# Altium PCB SWM1000模块封装.PcbDoc
Units mil, origin at the board's own origin, x right, y up, seen from the top; angles counter-clockwise.
Board outline 944.88 x 1377.95 mil, 2 copper layers (Top, Bottom), stack 12.7 mil thick; 25 components, 0 nets, 25 pads, 0 vias.
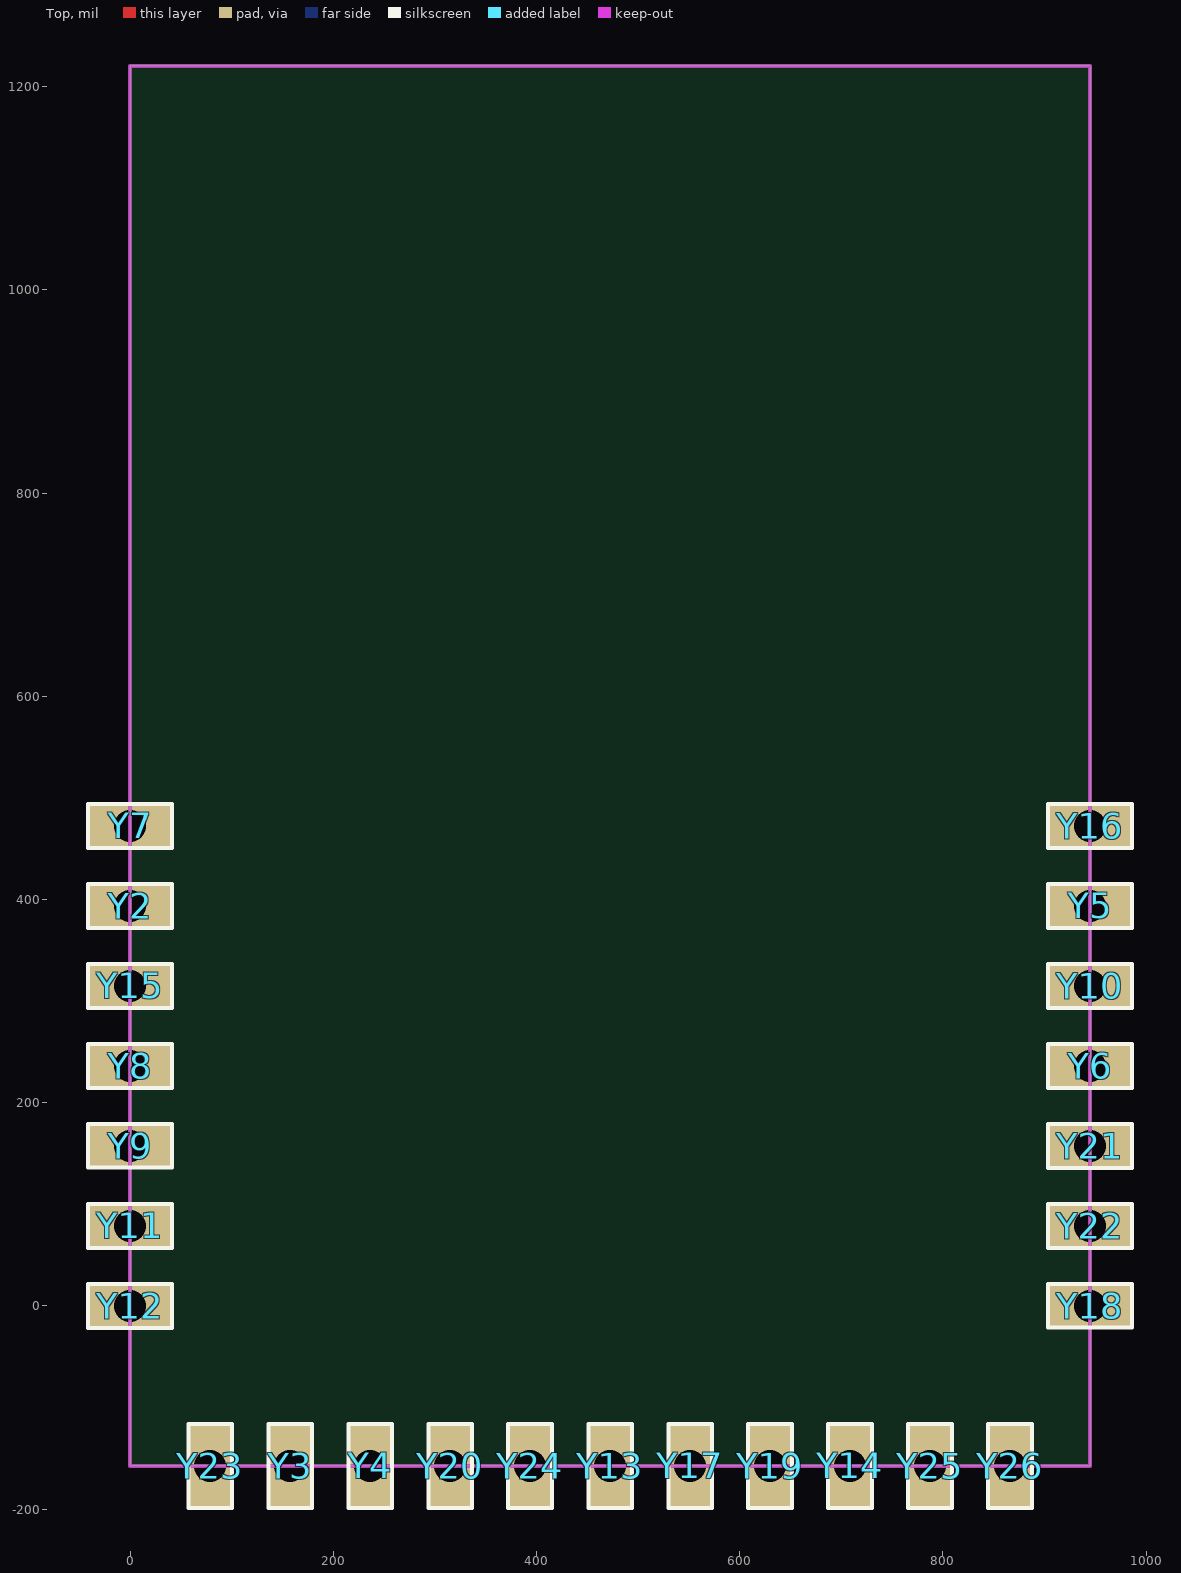
[diagram p0: Top view]
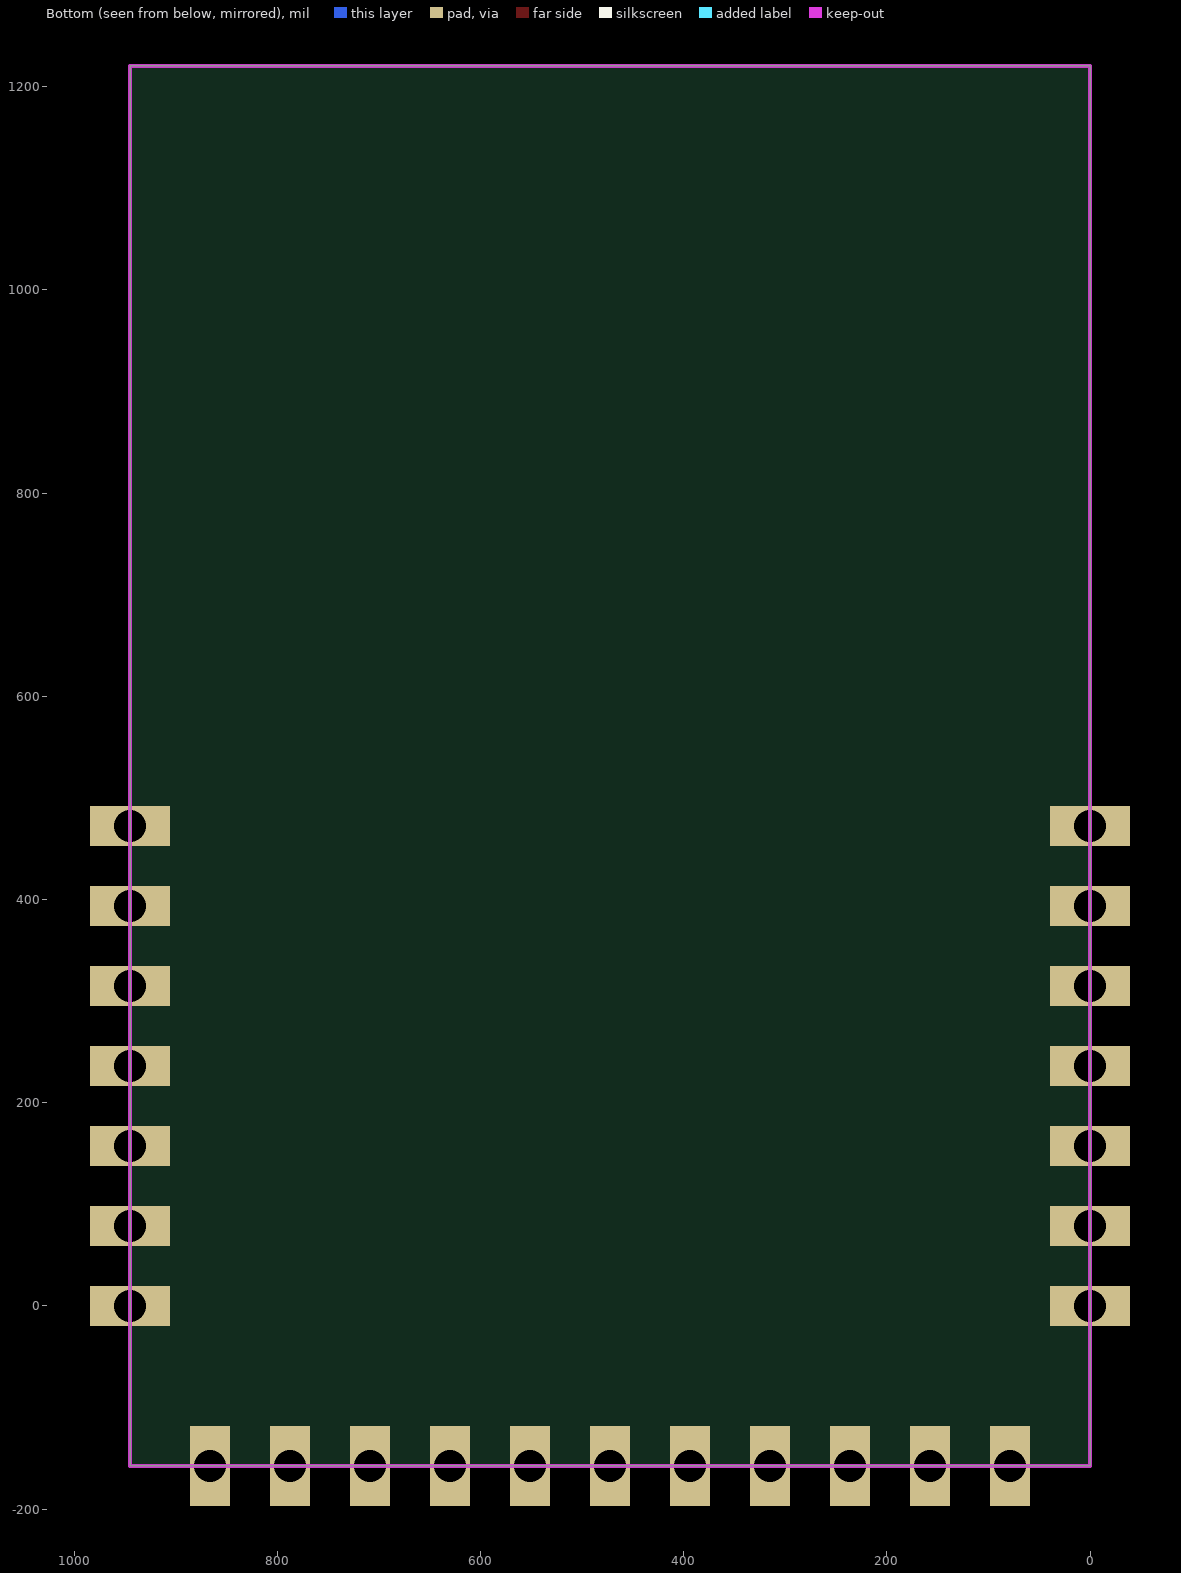
[diagram p1: Bottom view, seen from below]

## Layer stack, top to bottom
Solder Mask Top: solder mask 0.4, Solder Resist, Dk 3.5
Top: signal copper 1.35
Dielectric 1: dielectric 10, FR-4, Dk 4.3
Bottom: signal copper 1.35
Solder Mask Bottom: solder mask 0.4, Solder Resist, Dk 3.5

## Board outline
0,1220.47 944.88,1220.47 944.88,-157.48 0,-157.48

## Design rules (kind name [scope] priority, off if disabled: settings)
Clearance "'Default' PADS rule_20" [All] p1: gap=6.69
Clearance "'Default' PADS rule_19" [InPolygon vs InPolygon] p2: gap=9.84
Clearance "'Default' PADS rule_18" [All] p3: gap=6.69
Clearance "'Default' PADS rule_15" [IsVia vs IsVia] p4: gap=6.69
ComponentClearance "'Default' PADS rule_12" [All] p1: gap=6 collisioncheckmode=3 verticalgap=10 showdistances=FALSE
FlightTimeFalling "'Default' PADS rule_10" [All] p1: maximum=10.00
FlightTimeRising "'Default' PADS rule_9" [All] p1: maximum=10.00
Length "'Default' PADS rule_5" [All] p1: maxlimit=50000 minlimit=0
MatchedLengths "'Default' PADS rule_11" [InNetClass('All Nets')] p1: tolerance=200 checknetsindiffpair=TRUE checkdiffpairvsdiffpair=TRUE checkothers=TRUE
MaxMinImpedance "'Default' PADS rule_8" [All] p1: minimum=50.00 maximum=150.0
ParallelSegment "'Default' PADS rule_7" [All] p1: limit=1000 gap=200
ParallelSegment "'Default' PADS rule_6" [All] p2: limit=1000 gap=200
PlaneClearance "'Default' PADS rule_14" [All] p1: clearance=9.84
PlaneConnect "Power Plane Connect Style - pads with no thermal" [(Name='Y10-1') Or (Name='Y11-1') Or (Name='Y12-1') Or (Name='Y13-1') Or (Name='Y14-1') Or (Name='Y15-1') Or (Name='Y16-1') Or (Name='Y17-1') Or (Name='Y18-1') Or (Name='Y19-1') Or (Name='Y2-1') Or (Name='Y20-1') Or (Name='Y21-1') Or (Name='Y22-1') Or (Name='Y23-1') Or (Name='Y24-1') Or (Name='Y25-1') Or (Name='Y26-1') Or (Name='Y3-1') Or (Name='Y4-1') Or (Name='Y5-1') Or (Name='Y6-1') Or (Name='Y7-1') Or (Name='Y8-1') Or (Name='Y9-1')] p1: planeconnectstyle=NoConnect reliefexpansion=20 reliefentries=4 reliefconductorwidth=10 reliefairgap=10 // PAD - No Thermal Connect Rule
PlaneConnect "Power Plane Connect Style - Via from round thru-hole global defaults" [IsVia] p2: planeconnectstyle=Direct reliefexpansion=20 reliefentries=4 reliefconductorwidth=6.69 reliefairgap=10
PlaneConnect "Power Plane Connect Style - Round thru-hole pad from global defaults" [IsPad And OnMultiLayer And (PadShape_MidLayer1 = 'Round') And (PadXSize_MidLayer1 = PadYSize_MidLayer1)] p3: planeconnectstyle=Direct reliefexpansion=20 reliefentries=4 reliefconductorwidth=6.69 reliefairgap=10
PlaneConnect "Power Plane Connect Style - Square thru-hole pad from global defaults" [IsPad And OnMultiLayer And ((PadShape_MidLayer1 = 'Rectangular') Or (PadShape_MidLayer1 = 'Octagonal') Or (PadShape_MidLayer1 = 'Rounded Rectangle')) And (PadXSize_MidLayer1 = PadYSize_MidLayer1)] p4: planeconnectstyle=Direct reliefexpansion=20 reliefentries=4 reliefconductorwidth=6.69 reliefairgap=10
PlaneConnect "Power Plane Connect Style - Rect thru-hole pad from global defaults" [IsPad And OnMultiLayer And ((PadShape_MidLayer1 = 'Rectangular') Or (PadShape_MidLayer1 = 'Octagonal') Or (PadShape_MidLayer1 = 'Rounded Rectangle')) And (PadXSize_MidLayer1 <> PadYSize_MidLayer1)] p5: planeconnectstyle=Direct reliefexpansion=20 reliefentries=4 reliefconductorwidth=6.69 reliefairgap=10
PlaneConnect "Power Plane Connect Style - Square-rect thru-hole pad from global defaults" [IsPad And OnMultiLayer And (PadShape_MidLayer1 = 'Rounded Rectangle') And (PadXSize_MidLayer1 = PadYSize_MidLayer1) And (Pad_CornerRadius_MidLayer1 = '0%')] p6: planeconnectstyle=Direct reliefexpansion=20 reliefentries=4 reliefconductorwidth=6.69 reliefairgap=10
PlaneConnect "Power Plane Connect Style - Oval thru-hole pad from global defaults" [IsPad And OnMultiLayer And (PadShape_MidLayer1 = 'Round') And (PadXSize_MidLayer1 <> PadYSize_MidLayer1)] p7: planeconnectstyle=Direct reliefexpansion=20 reliefentries=4 reliefconductorwidth=6.69 reliefairgap=10
PlaneConnect "Power Plane Connect Style - Round-oval thru-hole pad from global defaults" [IsPad And OnMultiLayer And (PadShape_MidLayer1 = 'Rounded Rectangle') And (PadXSize_MidLayer1 = PadYSize_MidLayer1) And (Pad_CornerRadius_MidLayer1 = '100%')] p8: planeconnectstyle=Direct reliefexpansion=20 reliefentries=4 reliefconductorwidth=6.69 reliefairgap=10
PolygonConnect "Polygon Connect Style - Bottom Round SMD from global defaults" [IsSMTPin And (PadShape_BottomLayer = 'Round') And (PadXSize_BottomLayer = PADYSize_BottomLayer) vs Layer = 'Bottom'] p1: connectstyle=Direct reliefconductorwidth=6.69 reliefentries=4 polygonreliefangle="45 Angle" airgapwidth=10
PolygonConnect "Polygon Connect Style - Top Round SMD from global defaults" [IsSMTPin And (PadShape_TopLayer = 'Round') And (PadXSize_TopLayer = PADYSize_TopLayer) vs Layer = 'Top'] p2: connectstyle=Direct reliefconductorwidth=6.69 reliefentries=4 polygonreliefangle="45 Angle" airgapwidth=10
PolygonConnect "Polygon Connect Style - Bottom Square SMD from global defaults 1" [IsSMTPin And (PadShape_BottomLayer = 'Rectangular') And (PadXSize_BottomLayer = PADYSize_BottomLayer) vs Layer = 'Bottom'] p3: connectstyle=Direct reliefconductorwidth=6.69 reliefentries=4 polygonreliefangle="45 Angle" airgapwidth=10
PolygonConnect "Polygon Connect Style - Bottom Square SMD from global defaults 2" [IsSMTPin And (PadShape_BottomLayer = 'Octagonal') And (PadXSize_BottomLayer = PADYSize_BottomLayer) vs Layer = 'Bottom'] p4: connectstyle=Direct reliefconductorwidth=6.69 reliefentries=4 polygonreliefangle="45 Angle" airgapwidth=10
PolygonConnect "Polygon Connect Style - Bottom Square SMD from global defaults 3" [IsSMTPin And (PadShape_BottomLayer = 'Rounded Rectangle') And (PadXSize_BottomLayer = PADYSize_BottomLayer) vs Layer = 'Bottom'] p5: connectstyle=Direct reliefconductorwidth=6.69 reliefentries=4 polygonreliefangle="45 Angle" airgapwidth=10
PolygonConnect "Polygon Connect Style - Top Square SMD from global defaults 1" [IsSMTPin And (PadShape_TopLayer = 'Rectangular') And (PadXSize_TopLayer = PADYSize_TopLayer) vs Layer = 'Top'] p6: connectstyle=Direct reliefconductorwidth=6.69 reliefentries=4 polygonreliefangle="45 Angle" airgapwidth=10
PolygonConnect "Polygon Connect Style - Top Square SMD from global defaults 2" [IsSMTPin And (PadShape_TopLayer = 'Octagonal') And (PadXSize_TopLayer = PADYSize_TopLayer) vs Layer = 'Top'] p7: connectstyle=Direct reliefconductorwidth=6.69 reliefentries=4 polygonreliefangle="45 Angle" airgapwidth=10
PolygonConnect "Polygon Connect Style - Top Square SMD from global defaults 3" [IsSMTPin And (PadShape_TopLayer = 'Rounded Rectangle') And (PadXSize_TopLayer = PADYSize_TopLayer) vs Layer = 'Top'] p8: connectstyle=Direct reliefconductorwidth=6.69 reliefentries=4 polygonreliefangle="45 Angle" airgapwidth=10
PolygonConnect "Polygon Connect Style - Bottom Rect SMD from global defaults 1" [IsSMTPin And (PadShape_BottomLayer = 'Rectangular') And (PadXSize_BottomLayer <> PADYSize_BottomLayer) vs Layer = 'Bottom'] p9: connectstyle=Direct reliefconductorwidth=6.69 reliefentries=4 polygonreliefangle="45 Angle" airgapwidth=10
PolygonConnect "Polygon Connect Style - Bottom Rect SMD from global defaults 2" [IsSMTPin And (PadShape_BottomLayer = 'Octagonal') And (PadXSize_BottomLayer <> PADYSize_BottomLayer) vs Layer = 'Bottom'] p10: connectstyle=Direct reliefconductorwidth=6.69 reliefentries=4 polygonreliefangle="45 Angle" airgapwidth=10
PolygonConnect "Polygon Connect Style - Bottom Rect SMD from global defaults 3" [IsSMTPin And (PadShape_BottomLayer = 'Rounded Rectangle') And (PadXSize_BottomLayer <> PADYSize_BottomLayer) vs Layer = 'Bottom'] p11: connectstyle=Direct reliefconductorwidth=6.69 reliefentries=4 polygonreliefangle="45 Angle" airgapwidth=10
PolygonConnect "Polygon Connect Style - Bottom Square-rect SMD pad from global defaults" [IsSMTPin And (PadShape_BottomLayer = 'Rounded Rectangle') And (PadXSize_BottomLayer = PADYSize_BottomLayer) And (Pad_CornerRadius_BottomLayer = '0%') vs Layer = 'Bottom'] p12: connectstyle=Direct reliefconductorwidth=6.69 reliefentries=4 polygonreliefangle="45 Angle" airgapwidth=10
PolygonConnect "Polygon Connect Style - Top Rect SMD from global defaults 1" [IsSMTPin And (PadShape_TopLayer = 'Rectangular') And (PadXSize_TopLayer <> PADYSize_TopLayer) vs Layer = 'Top'] p13: connectstyle=Direct reliefconductorwidth=6.69 reliefentries=4 polygonreliefangle="45 Angle" airgapwidth=10
PolygonConnect "Polygon Connect Style - Top Rect SMD from global defaults 2" [IsSMTPin And (PadShape_TopLayer = 'Octagonal') And (PadXSize_TopLayer <> PADYSize_TopLayer) vs Layer = 'Top'] p14: connectstyle=Direct reliefconductorwidth=6.69 reliefentries=4 polygonreliefangle="45 Angle" airgapwidth=10
PolygonConnect "Polygon Connect Style - Top Rect SMD from global defaults 3" [IsSMTPin And (PadShape_TopLayer = 'Rounded Rectangle') And (PadXSize_TopLayer <> PADYSize_TopLayer) vs Layer = 'Top'] p15: connectstyle=Direct reliefconductorwidth=6.69 reliefentries=4 polygonreliefangle="45 Angle" airgapwidth=10
PolygonConnect "Polygon Connect Style - Top Square-rect SMD pad from global defaults" [IsSMTPin And (PadShape_TopLayer = 'Rounded Rectangle') And (PadXSize_TopLayer = PADYSize_TopLayer) And (Pad_CornerRadius_TopLayer = '0%') vs Layer = 'Top'] p16: connectstyle=Direct reliefconductorwidth=6.69 reliefentries=4 polygonreliefangle="45 Angle" airgapwidth=10
PolygonConnect "Polygon Connect Style - Bottom Oval SMD from global defaults" [IsSMTPin And (PadShape_BottomLayer = 'Round') And (PadXSize_BottomLayer <> PADYSize_BottomLayer) vs Layer = 'Bottom'] p17: connectstyle=Direct reliefconductorwidth=6.69 reliefentries=4 polygonreliefangle="45 Angle" airgapwidth=10
PolygonConnect "Polygon Connect Style - Bottom Round-oval SMD pad from global defaults" [IsSMTPin And (PadShape_BottomLayer = 'Rounded Rectangle') And (PadXSize_BottomLayer = PADYSize_BottomLayer) And (Pad_CornerRadius_BottomLayer = '100%') vs Layer = 'Bottom'] p18: connectstyle=Direct reliefconductorwidth=6.69 reliefentries=4 polygonreliefangle="45 Angle" airgapwidth=10
PolygonConnect "Polygon Connect Style - Top Oval SMD from global defaults" [IsSMTPin And (PadShape_TopLayer = 'Round') And (PadXSize_TopLayer <> PADYSize_TopLayer) vs Layer = 'Top'] p19: connectstyle=Direct reliefconductorwidth=6.69 reliefentries=4 polygonreliefangle="45 Angle" airgapwidth=10
PolygonConnect "Polygon Connect Style - Top Round-oval SMD pad from global defaults" [IsSMTPin And (PadShape_TopLayer = 'Rounded Rectangle') And (PadXSize_TopLayer = PADYSize_TopLayer) And (Pad_CornerRadius_TopLayer = '100%') vs Layer = 'Top'] p20: connectstyle=Direct reliefconductorwidth=6.69 reliefentries=4 polygonreliefangle="45 Angle" airgapwidth=10
PolygonConnect "Polygon Connect Style - Via from round thru-hole global defaults_23" [IsVia] p21: connectstyle=Direct reliefconductorwidth=6.69 reliefentries=4 polygonreliefangle="45 Angle" airgapwidth=10
PolygonConnect "Polygon Connect Style - Bottom Round thru-hole pad from global defaults" [IsPad And OnMultiLayer And (PadShape_BottomLayer = 'Round') And (PadXSize_BottomLayer = PADYSize_BottomLayer) vs Layer = 'Bottom'] p22: connectstyle=Direct reliefconductorwidth=6.69 reliefentries=4 polygonreliefangle="45 Angle" airgapwidth=10
PolygonConnect "Polygon Connect Style - Via from round thru-hole global defaults_22" [IsVia] p23: connectstyle=Direct reliefconductorwidth=6.69 reliefentries=4 polygonreliefangle="45 Angle" airgapwidth=10
PolygonConnect "Polygon Connect Style - Inner Layer 3 Round thru-hole pad from global defaults" [IsPad And OnMultiLayer And (PadShape_MidLayer2 = 'Round') And (PadXSize_MidLayer2 = PADYSize_MidLayer2) vs Layer = 'Inner Layer 3'] p24: connectstyle=Direct reliefconductorwidth=6.69 reliefentries=4 polygonreliefangle="45 Angle" airgapwidth=10
PolygonConnect "Polygon Connect Style - Via from round thru-hole global defaults_21" [IsVia] p25: connectstyle=Direct reliefconductorwidth=6.69 reliefentries=4 polygonreliefangle="45 Angle" airgapwidth=10
PolygonConnect "Polygon Connect Style - Inner Layer 2 Round thru-hole pad from global defaults" [IsPad And OnMultiLayer And (PadShape_MidLayer1 = 'Round') And (PadXSize_MidLayer1 = PADYSize_MidLayer1) vs Layer = 'Inner Layer 2'] p26: connectstyle=Direct reliefconductorwidth=6.69 reliefentries=4 polygonreliefangle="45 Angle" airgapwidth=10
PolygonConnect "Polygon Connect Style - Via from round thru-hole global defaults" [IsVia] p27: connectstyle=Direct reliefconductorwidth=6.69 reliefentries=4 polygonreliefangle="45 Angle" airgapwidth=10
PolygonConnect "Polygon Connect Style - Top Round thru-hole pad from global defaults" [IsPad And OnMultiLayer And (PadShape_TopLayer = 'Round') And (PadXSize_TopLayer = PADYSize_TopLayer) vs Layer = 'Top'] p28: connectstyle=Direct reliefconductorwidth=6.69 reliefentries=4 polygonreliefangle="45 Angle" airgapwidth=10
PolygonConnect "Polygon Connect Style - Bottom Square thru-hole pad from global defaults" [IsPad And OnMultiLayer And ((PadShape_BottomLayer = 'Rectangular') Or (PadShape_BottomLayer = 'Octagonal') Or (PadShape_BottomLayer = 'Rounded Rectangle')) And (PadXSize_BottomLayer = PADYSize_BottomLayer) vs Layer = 'Bottom'] p29: connectstyle=Direct reliefconductorwidth=6.69 reliefentries=4 polygonreliefangle="45 Angle" airgapwidth=10
PolygonConnect "Polygon Connect Style - Inner Layer 3 Square thru-hole pad from global defaults" [IsPad And OnMultiLayer And ((PadShape_MidLayer2 = 'Rectangular') Or (PadShape_MidLayer2 = 'Octagonal') Or (PadShape_MidLayer2 = 'Rounded Rectangle')) And (PadXSize_MidLayer2 = PADYSize_MidLayer2) vs Layer = 'Inner Layer 3'] p30: connectstyle=Direct reliefconductorwidth=6.69 reliefentries=4 polygonreliefangle="45 Angle" airgapwidth=10
PolygonConnect "Polygon Connect Style - Inner Layer 2 Square thru-hole pad from global defaults" [IsPad And OnMultiLayer And ((PadShape_MidLayer1 = 'Rectangular') Or (PadShape_MidLayer1 = 'Octagonal') Or (PadShape_MidLayer1 = 'Rounded Rectangle')) And (PadXSize_MidLayer1 = PADYSize_MidLayer1) vs Layer = 'Inner Layer 2'] p31: connectstyle=Direct reliefconductorwidth=6.69 reliefentries=4 polygonreliefangle="45 Angle" airgapwidth=10
PolygonConnect "Polygon Connect Style - Top Square thru-hole pad from global defaults" [IsPad And OnMultiLayer And ((PadShape_TopLayer = 'Rectangular') Or (PadShape_TopLayer = 'Octagonal') Or (PadShape_TopLayer = 'Rounded Rectangle')) And (PadXSize_TopLayer = PADYSize_TopLayer) vs Layer = 'Top'] p32: connectstyle=Direct reliefconductorwidth=6.69 reliefentries=4 polygonreliefangle="45 Angle" airgapwidth=10
PolygonConnect "Polygon Connect Style - Bottom Rect thru-hole pad from global defaults" [IsPad And OnMultiLayer And ((PadShape_BottomLayer = 'Rectangular') Or (PadShape_BottomLayer = 'Octagonal') Or (PadShape_BottomLayer = 'Rounded Rectangle')) And (PadXSize_BottomLayer <> PADYSize_BottomLayer) vs Layer = 'Bottom'] p33: connectstyle=Direct reliefconductorwidth=6.69 reliefentries=4 polygonreliefangle="45 Angle" airgapwidth=10
PolygonConnect "Polygon Connect Style - Bottom Square-rect thru-hole pad from global defaults" [IsPad And OnMultiLayer And (PadShape_BottomLayer = 'Rounded Rectangle') And (PadXSize_BottomLayer = PADYSize_BottomLayer) And (Pad_CornerRadius_BottomLayer = '0%') vs Layer = 'Bottom'] p34: connectstyle=Direct reliefconductorwidth=6.69 reliefentries=4 polygonreliefangle="45 Angle" airgapwidth=10
PolygonConnect "Polygon Connect Style - Inner Layer 3 Rect thru-hole pad from global defaults" [IsPad And OnMultiLayer And ((PadShape_MidLayer2 = 'Rectangular') Or (PadShape_MidLayer2 = 'Octagonal') Or (PadShape_MidLayer2 = 'Rounded Rectangle')) And (PadXSize_MidLayer2 <> PADYSize_MidLayer2) vs Layer = 'Inner Layer 3'] p35: connectstyle=Direct reliefconductorwidth=6.69 reliefentries=4 polygonreliefangle="45 Angle" airgapwidth=10
PolygonConnect "Polygon Connect Style - Inner Layer 3 Square-rect thru-hole pad from global defaults" [IsPad And OnMultiLayer And (PadShape_MidLayer2 = 'Rounded Rectangle') And (PadXSize_MidLayer2 = PADYSize_MidLayer2) And (Pad_CornerRadius_MidLayer2 = '0%') vs Layer = 'Inner Layer 3'] p36: connectstyle=Direct reliefconductorwidth=6.69 reliefentries=4 polygonreliefangle="45 Angle" airgapwidth=10
PolygonConnect "Polygon Connect Style - Inner Layer 2 Rect thru-hole pad from global defaults" [IsPad And OnMultiLayer And ((PadShape_MidLayer1 = 'Rectangular') Or (PadShape_MidLayer1 = 'Octagonal') Or (PadShape_MidLayer1 = 'Rounded Rectangle')) And (PadXSize_MidLayer1 <> PADYSize_MidLayer1) vs Layer = 'Inner Layer 2'] p37: connectstyle=Direct reliefconductorwidth=6.69 reliefentries=4 polygonreliefangle="45 Angle" airgapwidth=10
PolygonConnect "Polygon Connect Style - Inner Layer 2 Square-rect thru-hole pad from global defaults" [IsPad And OnMultiLayer And (PadShape_MidLayer1 = 'Rounded Rectangle') And (PadXSize_MidLayer1 = PADYSize_MidLayer1) And (Pad_CornerRadius_MidLayer1 = '0%') vs Layer = 'Inner Layer 2'] p38: connectstyle=Direct reliefconductorwidth=6.69 reliefentries=4 polygonreliefangle="45 Angle" airgapwidth=10
PolygonConnect "Polygon Connect Style - Top Rect thru-hole pad from global defaults" [IsPad And OnMultiLayer And ((PadShape_TopLayer = 'Rectangular') Or (PadShape_TopLayer = 'Octagonal') Or (PadShape_TopLayer = 'Rounded Rectangle')) And (PadXSize_TopLayer <> PADYSize_TopLayer) vs Layer = 'Top'] p39: connectstyle=Direct reliefconductorwidth=6.69 reliefentries=4 polygonreliefangle="45 Angle" airgapwidth=10
PolygonConnect "Polygon Connect Style - Top Square-rect thru-hole pad from global defaults" [IsPad And OnMultiLayer And (PadShape_TopLayer = 'Rounded Rectangle') And (PadXSize_TopLayer = PADYSize_TopLayer) And (Pad_CornerRadius_TopLayer = '0%') vs Layer = 'Top'] p40: connectstyle=Direct reliefconductorwidth=6.69 reliefentries=4 polygonreliefangle="45 Angle" airgapwidth=10
PolygonConnect "Polygon Connect Style - Bottom Oval thru-hole pad from global defaults" [IsPad And OnMultiLayer And (PadShape_BottomLayer = 'Round') And (PadXSize_BottomLayer <> PADYSize_BottomLayer) vs Layer = 'Bottom'] p41: connectstyle=Direct reliefconductorwidth=6.69 reliefentries=4 polygonreliefangle="45 Angle" airgapwidth=10
PolygonConnect "Polygon Connect Style - Bottom Round-oval thru-hole pad from global defaults" [IsPad And OnMultiLayer And (PadShape_BottomLayer = 'Rounded Rectangle') And (PadXSize_BottomLayer = PADYSize_BottomLayer) And (Pad_CornerRadius_BottomLayer = '100%') vs Layer = 'Bottom'] p42: connectstyle=Direct reliefconductorwidth=6.69 reliefentries=4 polygonreliefangle="45 Angle" airgapwidth=10
PolygonConnect "Polygon Connect Style - Inner Layer 3 Oval thru-hole pad from global defaults" [IsPad And OnMultiLayer And (PadShape_MidLayer2 = 'Round') And (PadXSize_MidLayer2 <> PADYSize_MidLayer2) vs Layer = 'Inner Layer 3'] p43: connectstyle=Direct reliefconductorwidth=6.69 reliefentries=4 polygonreliefangle="45 Angle" airgapwidth=10
PolygonConnect "Polygon Connect Style - Inner Layer 3 Round-oval thru-hole pad from global defaults" [IsPad And OnMultiLayer And (PadShape_MidLayer2 = 'Rounded Rectangle') And (PadXSize_MidLayer2 = PADYSize_MidLayer2) And (Pad_CornerRadius_MidLayer2 = '100%') vs Layer = 'Inner Layer 3'] p44: connectstyle=Direct reliefconductorwidth=6.69 reliefentries=4 polygonreliefangle="45 Angle" airgapwidth=10
PolygonConnect "Polygon Connect Style - Inner Layer 2 Oval thru-hole pad from global defaults" [IsPad And OnMultiLayer And (PadShape_MidLayer1 = 'Round') And (PadXSize_MidLayer1 <> PADYSize_MidLayer1) vs Layer = 'Inner Layer 2'] p45: connectstyle=Direct reliefconductorwidth=6.69 reliefentries=4 polygonreliefangle="45 Angle" airgapwidth=10
PolygonConnect "Polygon Connect Style - Inner Layer 2 Round-oval thru-hole pad from global defaults" [IsPad And OnMultiLayer And (PadShape_MidLayer1 = 'Rounded Rectangle') And (PadXSize_MidLayer1 = PADYSize_MidLayer1) And (Pad_CornerRadius_MidLayer1 = '100%') vs Layer = 'Inner Layer 2'] p46: connectstyle=Direct reliefconductorwidth=6.69 reliefentries=4 polygonreliefangle="45 Angle" airgapwidth=10
PolygonConnect "Polygon Connect Style - Top Oval thru-hole pad from global defaults" [IsPad And OnMultiLayer And (PadShape_TopLayer = 'Round') And (PadXSize_TopLayer <> PADYSize_TopLayer) vs Layer = 'Top'] p47: connectstyle=Direct reliefconductorwidth=6.69 reliefentries=4 polygonreliefangle="45 Angle" airgapwidth=10
PolygonConnect "Polygon Connect Style - Top Round-oval thru-hole pad from global defaults" [IsPad And OnMultiLayer And (PadShape_TopLayer = 'Rounded Rectangle') And (PadXSize_TopLayer = PADYSize_TopLayer) And (Pad_CornerRadius_TopLayer = '100%') vs Layer = 'Top'] p48: connectstyle=Direct reliefconductorwidth=6.69 reliefentries=4 polygonreliefangle="45 Angle" airgapwidth=10
PolygonConnect [All] p49: connectstyle=Relief reliefconductorwidth=10 reliefentries=4 polygonreliefangle="90 Angle" airgapwidth=10
RoutingLayers "'Default' PADS rule_3" [All] p1: top layer_v5=TRUE bottom layer_v5=TRUE
RoutingPriority "'Default' PADS rule_2" [All] p1: routingpriority=3
RoutingTopology "'Default' PADS rule" [All] p1: topology=Shortest
RoutingVias "'Default' PADS rule_4" [All] p1: holewidth=9.84 width=15.75 viastyle="Through Hole" minholewidth=9.84 minwidth=15.75 maxholewidth=9.84 maxwidth=15.75
SMDToCorner "'Default' PADS rule_16" [All] p1: distance=66929
SMDToPlane "'Default' PADS rule_17" [All] p1: distance=66929
SolderMaskExpansion [All] p1: expansion=4
Width "'Default' PADS rule_13" [All] p1: maxlimit=236.22 minlimit=6 preferedwidth=7.87
23 further rules are at their usual default settings.

## Components (designator, comment, footprint, x,y, rotation, side; value= is the part's Value field where it differs from the comment)
Y2 "VIA2608" VIA2608 0,393.7 r90 top
Y3 "VIA2608" VIA2608 157.48,-157.48 r180 top
Y4 "VIA2608" VIA2608 236.22,-157.48 r180 top
Y5 "VIA2608" VIA2608 944.88,393.7 r90 top
Y6 "VIA2608" VIA2608 944.88,236.22 r90 top
Y7 "VIA2608" VIA2608 0,472.44 r90 top
Y8 "VIA2608" VIA2608 0,236.22 r90 top
Y9 "VIA2608" VIA2608 0,157.48 r270 top
Y10 "VIA2608" VIA2608 944.88,314.96 r90 top
Y11 "VIA2608" VIA2608 0,78.74 r90 top
Y12 "VIA2608" VIA2608 0,0 r90 top
Y13 "VIA2608" VIA2608 472.44,-157.48 r180 top
Y14 "VIA2608" VIA2608 708.66,-157.48 r0 top
Y15 "VIA2608" VIA2608 0,314.96 r90 top
Y16 "VIA2608" VIA2608 944.88,472.44 r90 top
Y17 "VIA2608" VIA2608 551.18,-157.48 r180 top
Y18 "VIA2608" VIA2608 944.88,0 r270 top
Y19 "VIA2608" VIA2608 629.92,-157.48 r0 top
Y20 "VIA2608" VIA2608 314.96,-157.48 r180 top
Y21 "VIA2608" VIA2608 944.88,157.48 r90 top
Y22 "VIA2608" VIA2608 944.88,78.74 r90 top
Y23 "VIA2608" VIA2608 78.74,-157.48 r180 top
Y24 "VIA2608" VIA2608 393.7,-157.48 r0 top
Y25 "VIA2608" VIA2608 787.4,-157.48 r0 top
Y26 "VIA2608" VIA2608 866.14,-157.48 r0 top

## Footprints (in the part's own frame and the unit in brackets; to place one, negate y for a bottom-side part, rotate by r counter-clockwise, add the part's x,y. Pads: shape width x height; smd on the part's side, far side on the other; paste and mask are expansions set on the pad)
VIA2608 [mm]
  rect 1x2 hole 0.8: 1(0,0)
  silkscreen extent -0.55,-1.05 0.54,1.05

## Nets (pads, with @x,y where several pads share a name; then routed paths per layer and width w, separated by ;. In a path a pad name is that pad's centre, name@x,y a point inside that pad or via, vN(x,y) a via of type N, cw(c..) or ccw(c..) an arc to the next point about the centre after c; other vN are vias at no path point)
pads on no net: Y2.1 Y3.1 Y4.1 Y5.1 Y6.1 Y7.1 Y8.1 Y9.1 Y10.1 Y11.1 Y12.1 Y13.1 Y14.1 Y15.1 Y16.1 Y17.1 Y18.1 Y19.1 Y20.1 Y21.1 Y22.1 Y23.1 Y24.1 Y25.1 Y26.1

## Keep-outs
Keep-Out Layer:
  the board outline again, w3.94